# Altium PCB PCB.PcbDoc
Units mil, origin at the board's own origin, x right, y up, seen from the top; angles counter-clockwise.
Board outline 2050.52 x 1035.06 mil, 2 copper layers (Top Layer, Bottom Layer); 12 components, 6 nets, 12 pads, 6 vias.
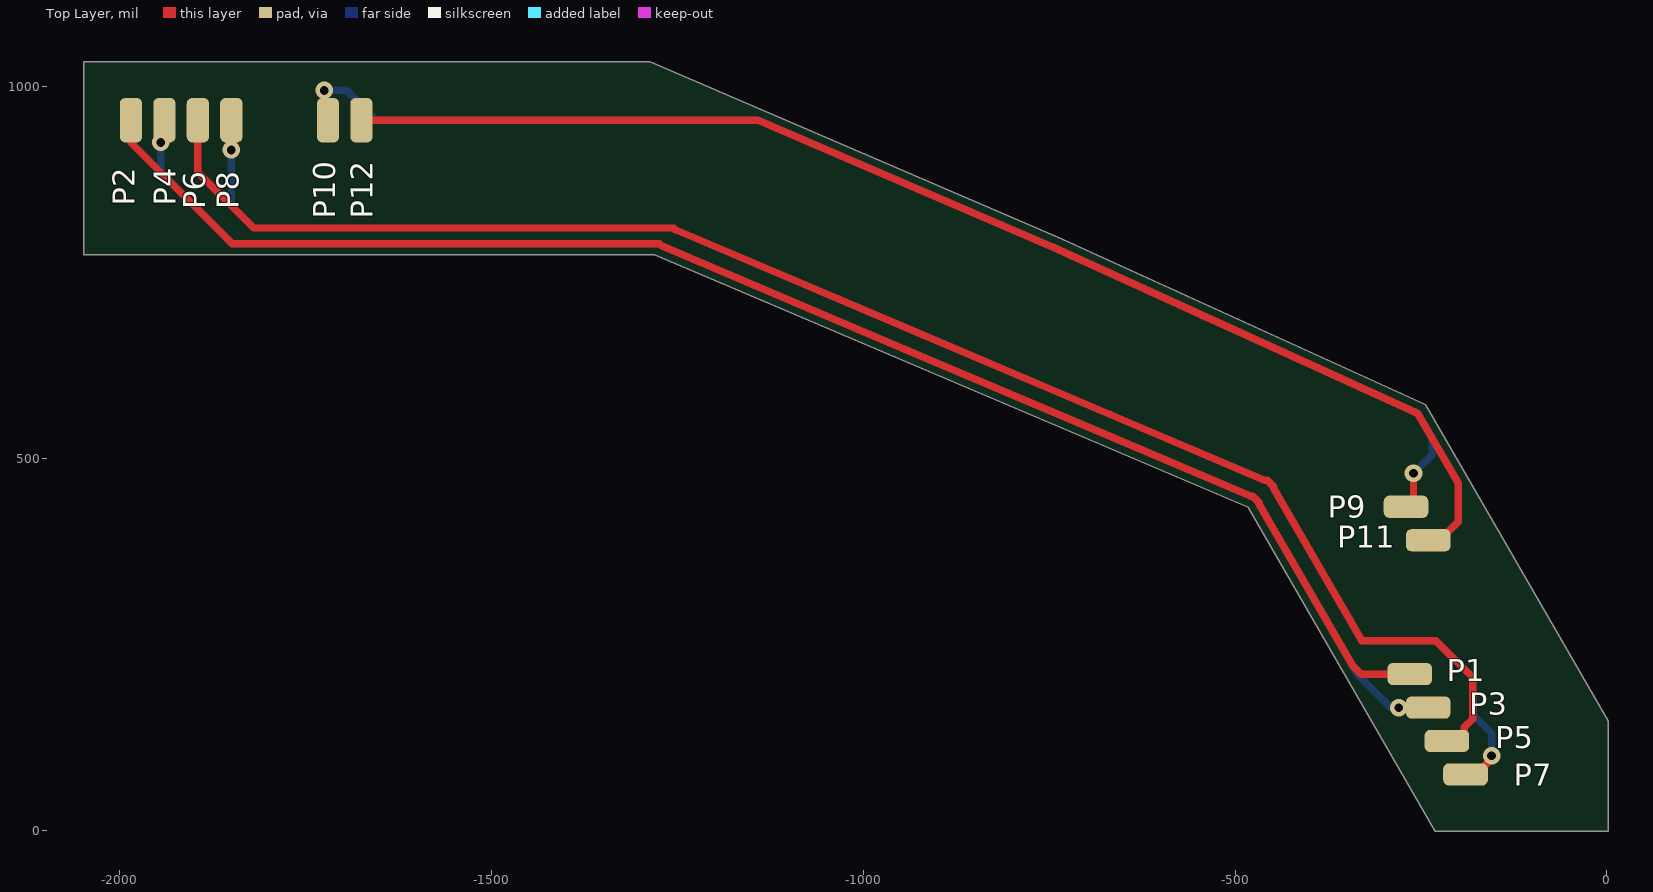
[diagram p0: Top Layer view]
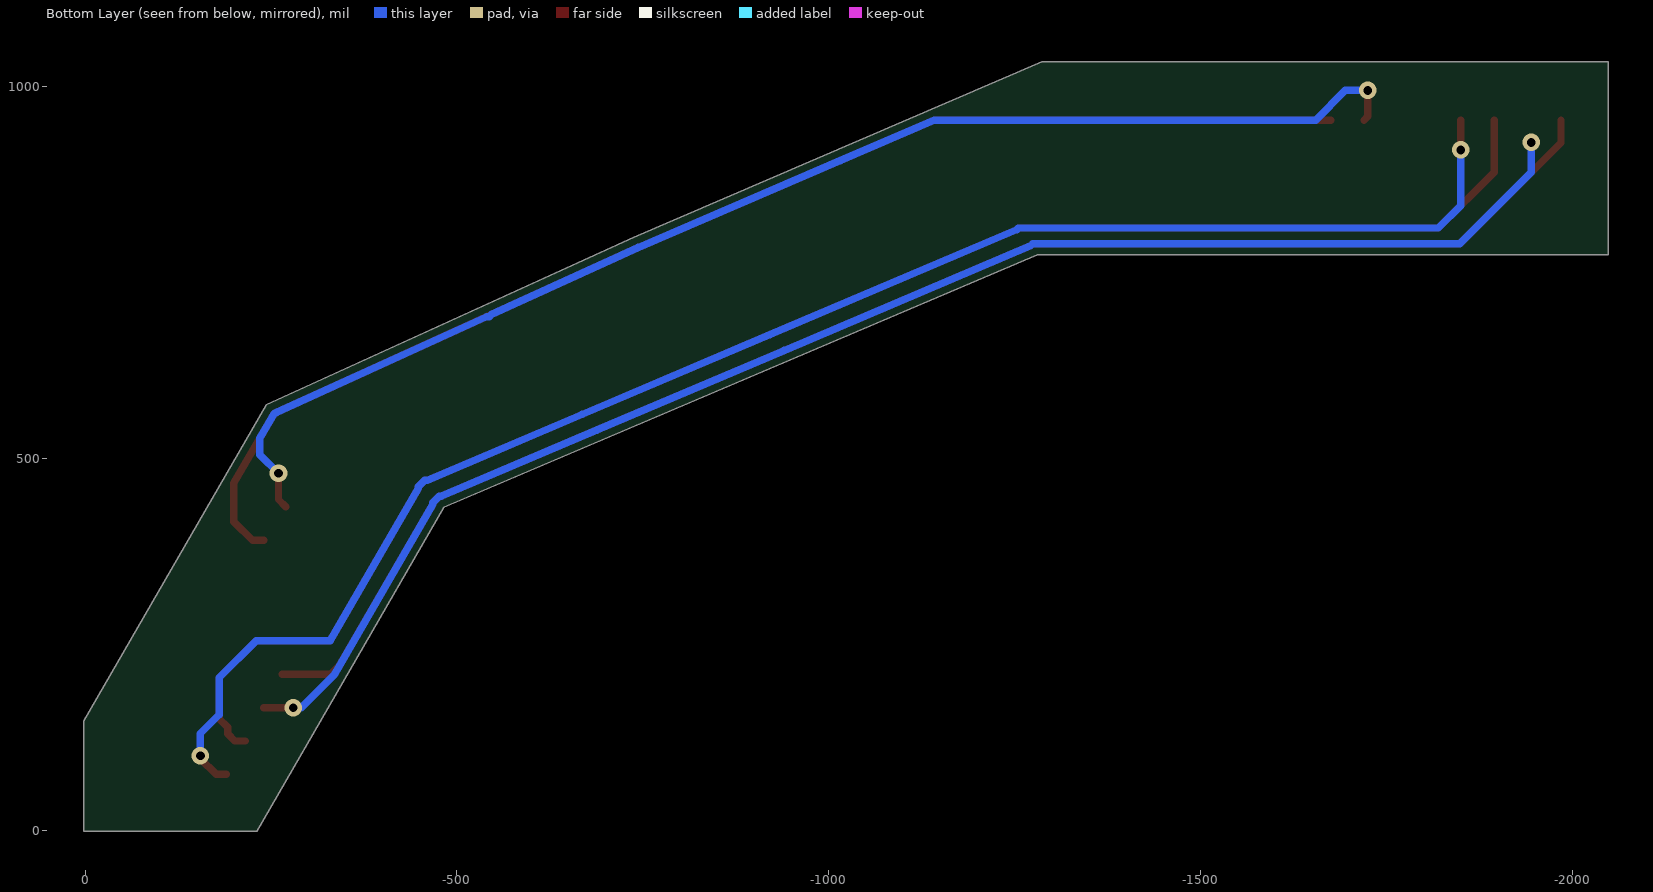
[diagram p1: Bottom Layer view, seen from below]

## Layer stack, top to bottom
Top Solder: solder mask 0.4, Solder Resist, Dk 3.5
Top Layer: signal copper 1.4
Dielectric 1: dielectric 12.6, FR-4, Dk 4.8
Bottom Layer: signal copper 1.4
Bottom Solder: solder mask 0.4, Solder Resist, Dk 3.5

## Board outline
-737.94,797.56 -1287.02,1033.58 -2048.54,1033.58 -2048.54,773.74 -1280.69,773.74 -482.18,434.27 -230.6,-1.48 1.98,-1.48 1.98,146.86 -243.51,572.06

## Design rules (kind name [scope] priority, off if disabled: settings)
AssemblyTestPointUsage [All] p1: allowmultiple=TRUE
AssemblyTestpoint [All] p1: testpointundercomponent=TRUE minsize=25 maxsize=100 preferedsize=25 minholesize=0 maxholesize=40 preferedholesize=10 testpointgrid=1 usegrid=TRUE gridtolerance=0.01 allowsidetop=TRUE allowsidebottom=TRUE
Clearance [All] p1: gap=10 ignorepadtopadclearanceinfootprint=FALSE except(0: Arc-Hole Track-Hole SMDPad-Hole THPad-Hole Via-Hole Fill-Hole Poly-Hole Region-Hole Text-Hole; 5.5: Arc-SMDPad Arc-THPad Arc-Via Arc-Text Track-SMDPad Track-THPad Track-Via Track-Text SMDPad-SMDPad SMDPad-THPad SMDPad-Via SMDPad-Text THPad-THPad THPad-Via THPad-Text Via-Via Via-Text Fill-Text Poly-Text Region-Text Text-Text)
FabricationTestPointUsage [All] p1: valid=0 allowmultiple=TRUE
FabricationTestpoint [All] p1: side=3 testpointundercomponent=TRUE minsize=25 maxsize=100 preferedsize=25 minholesize=7.7 maxholesize=40 preferedholesize=10 testpointgrid=1 allowsidetop=TRUE allowsidebottom=TRUE usegrid=TRUE gridtolerance=0.01
HoleSize [All] p1: absolutevalues=TRUE maxlimit=600 minlimit=7.7 maxpercent=80.000 minpercent=20.000
MinimumSolderMaskSliver [All] p1: minsoldermaskwidth=4
PlaneConnect PlaneConnect_via [IsVia] p1: planeconnectstyle=Direct reliefexpansion=20 reliefentries=4 reliefconductorwidth=10 reliefairgap=10
PlaneConnect [All] p2: planeconnectstyle=Relief reliefexpansion=20 reliefentries=4 reliefconductorwidth=10 reliefairgap=10
PolygonConnect PolygonConnect_via [IsVia] p1: connectstyle=Direct reliefconductorwidth=10 reliefentries=4 polygonreliefangle="90 Angle" airgapwidth=10
PolygonConnect [All] p2: connectstyle=Relief reliefconductorwidth=10 reliefentries=4 polygonreliefangle="90 Angle" airgapwidth=10
RoutingVias [All] p1: holewidth=11.81 width=23.62 viastyle="Through Hole" minholewidth=7.87 minwidth=15.75 maxholewidth=28 maxwidth=50
SilkToSilkClearance [All] p1: silktosilkclearance=1
SilkToSolderMaskClearance [IsPad] p1: minsilkscreentomaskgap=0 clearancetoexposedcopper=FALSE
SolderMaskExpansion SolderMaskExpansion_Via [IsVia] p1: expansion=2 istentingtop=TRUE
SolderMaskExpansion [All] p2: expansion=2 istentingtop=FALSE
UnRoutedNet [All] p1: checkbadconnections=TRUE
Width Width_power [InNet('No Net')] p1: maxlimit=50 minlimit=10 preferedwidth=10
Width [All] p2: maxlimit=10 minlimit=10 preferedwidth=10
20 further rules are at their usual default settings.

## Components (designator, comment, footprint, x,y, rotation, side; value= is the part's Value field where it differs from the comment)
P1 "Plug" PIN_CONN -265,210 r0 top
P2 "Plug" PIN_CONN -1985,955 r90 top
P3 "Plug" PIN_CONN -240,165 r0 top
P4 "Plug" PIN_CONN -1940,955 r90 top
P5 "Plug" PIN_CONN -215,120 r0 top
P6 "Plug" PIN_CONN -1895,955 r90 top
P7 "Plug" PIN_CONN -190,75 r0 top
P8 "Plug" PIN_CONN -1850,955 r90 top
P9 "Plug" PIN_CONN -270,435 r0 top
P10 "Plug" PIN_CONN -1720,955 r90 top
P11 "Plug" PIN_CONN -240,390 r0 top
P12 "Plug" PIN_CONN -1675,955 r90 top

## Footprints (in the part's own frame and the unit in brackets; to place one, negate y for a bottom-side part, rotate by r counter-clockwise, add the part's x,y. Pads: shape width x height; smd on the part's side, far side on the other; paste and mask are expansions set on the pad)
PIN_CONN [mil]
  rrect50% 60x30 smd: 1(0,0)

## Part data
P1 P2 P3 P4 P5 P6 P7 P8 P9 P10 P11 P12: LatestRevisionDate=17-Jul-2002, LatestRevisionNote="Re-released for DXP Platform.", Publisher="Altium Limited"

## Via types
v1: diameter 23.62, hole 11.81, Top Layer to Bottom Layer, tented both sides, 6 vias

## Nets (pads, with @x,y where several pads share a name; then routed paths per layer and width w, separated by ;. In a path a pad name is that pad's centre, name@x,y a point inside that pad or via, vN(x,y) a via of type N, cw(c..) or ccw(c..) an arc to the next point about the centre after c; other vN are vias at no path point)
NetP1_1: P1.1 P2.1 | length 2011.8
  Top Layer w10: P2.1 -1985,924.8 -1848.94,788.74 -1274.47,788.74 -1272.14,786.4 -940.39,645.37 -688.16,538.13 -479.12,449.27 -475.96,449.27 -467.18,440.48 -467.18,438.28 -343.15,223.46 ccw(c-334.48,228.46) -341.56,221.39 -330.17,210 P1.1
NetP3_1: P3.1 P4.1 | length 2010.9
  Top Layer w10: v1(-279.81,164.81) -279.71,164.9 -240.29,164.9 P3.1@-240.19,164.81
  Bottom Layer w10: v1(-1945,925) -1945,885 -1848.74,788.74 -1274.47,788.74 -1272.14,786.4 -940.39,645.37 -688.16,538.13 -479.12,449.27 -475.96,449.27 -467.18,440.48 -467.18,438.28 -335.45,210.13 -334.79,208.99 -290.61,164.81 v1(-279.81,164.81)
NetP5_1: P5.1 P6.1 | length 2137.8
  Top Layer w10: P6.1 -1895,885 -1820,810 -1255.03,810 -1252.69,807.67 -920.95,666.63 -668.71,559.39 -459.68,470.53 -456.52,470.53 -447.73,461.74 -447.73,459.54 -329.64,255 -230,255 -180,205 -180,150 -191.59,138.41 -191.59,129.81 -201.4,120 P5.1
NetP7_1: P7.1 P8.1 | length 2174.6
  Top Layer w10: v1(-1850,915) P8.1 ; P7.1 -176.35,75 -155,96.35 v1(-155,100)
  Bottom Layer w10: v1(-1850,915) -1850,840 -1820,810 -1255.03,810 -1252.69,807.67 -920.95,666.63 -668.71,559.39 -459.68,470.53 -456.52,470.53 -447.73,461.74 -447.73,459.54 -329.64,255 -230,255 -180,205 -180,155 -155,130 v1(-155,100)
NetP9_1: P9.1 P10.1 | length 1759
  Top Layer w10: v1(-1725,995) -1725,960 P10.1 ; P9.1 -269.81,435 -260,444.81 v1(-260,480)
  Bottom Layer w10: v1(-1725,995) -1695,995 -1655,955 -1142.19,955 -1015.56,900.57 -744.12,783.89 -744.02,783.85 -546.14,693.6 -543.21,690.67 -539.71,690.67 -257.01,561.73 -254.1,560.4 -236.34,529.65 -235,527.33 -235,505 v1(-260,480)
NetP11_1: P11.1 P12.1 | length 1714.9
  Top Layer w10: P12.1 -1142.19,955 -744.11,783.89 -744.01,783.85 -257.01,561.73 -254.1,560.4 -200,466.71 -200,415 -225,390 P11.1

## Silkscreen, mask and mechanical layers (free items; w line width, h text height)
Mechanical 1:
  the board outline again, w6